# Altium PCB FILTROS.PcbDoc
Units mm, origin at the board's own origin, x right, y up, seen from the top; angles counter-clockwise.
Board outline 40 x 50 mm, 2 copper layers (Top Layer, Bottom Layer); 40 components, 24 nets, 99 pads, 14 vias.
Unrouted connection lines stored in the file: 2.
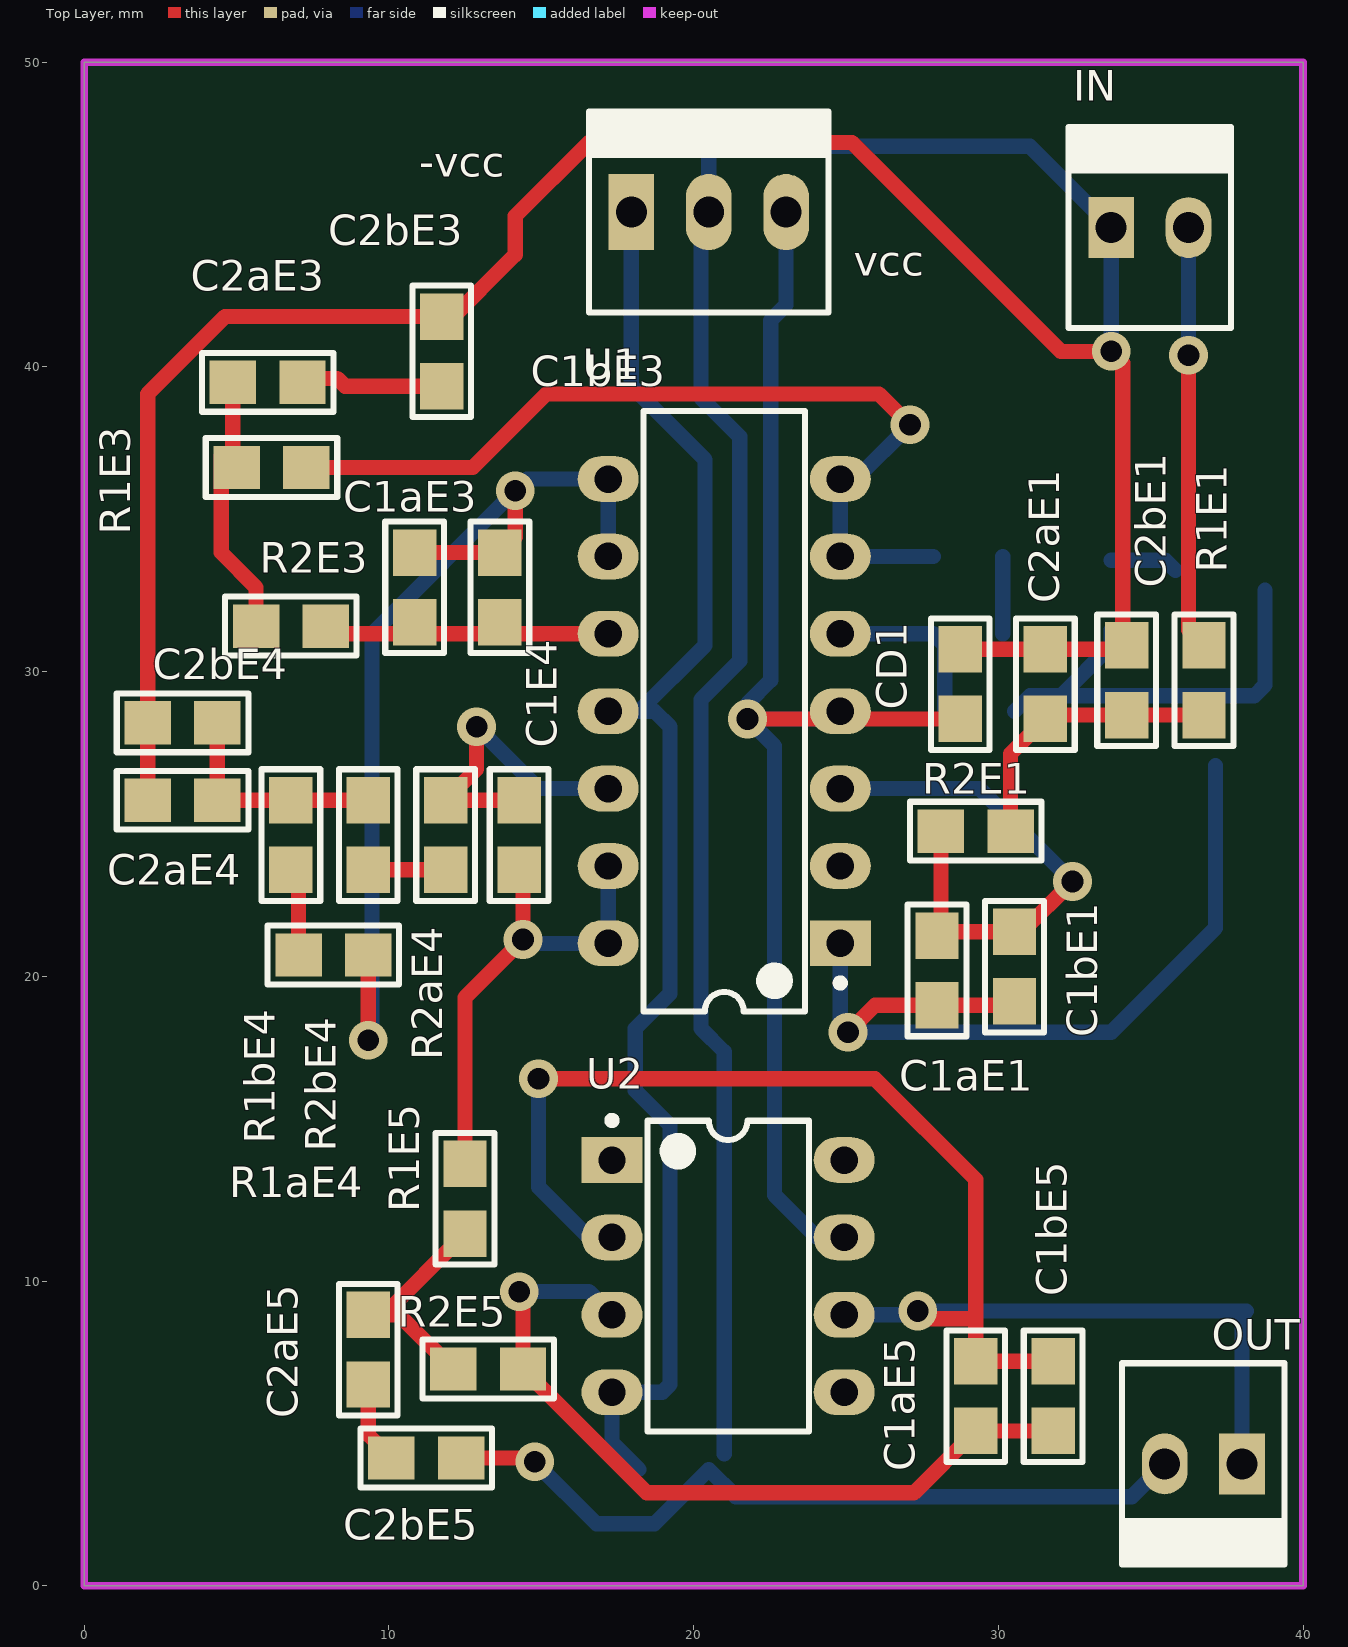
[diagram p0: Top Layer view]
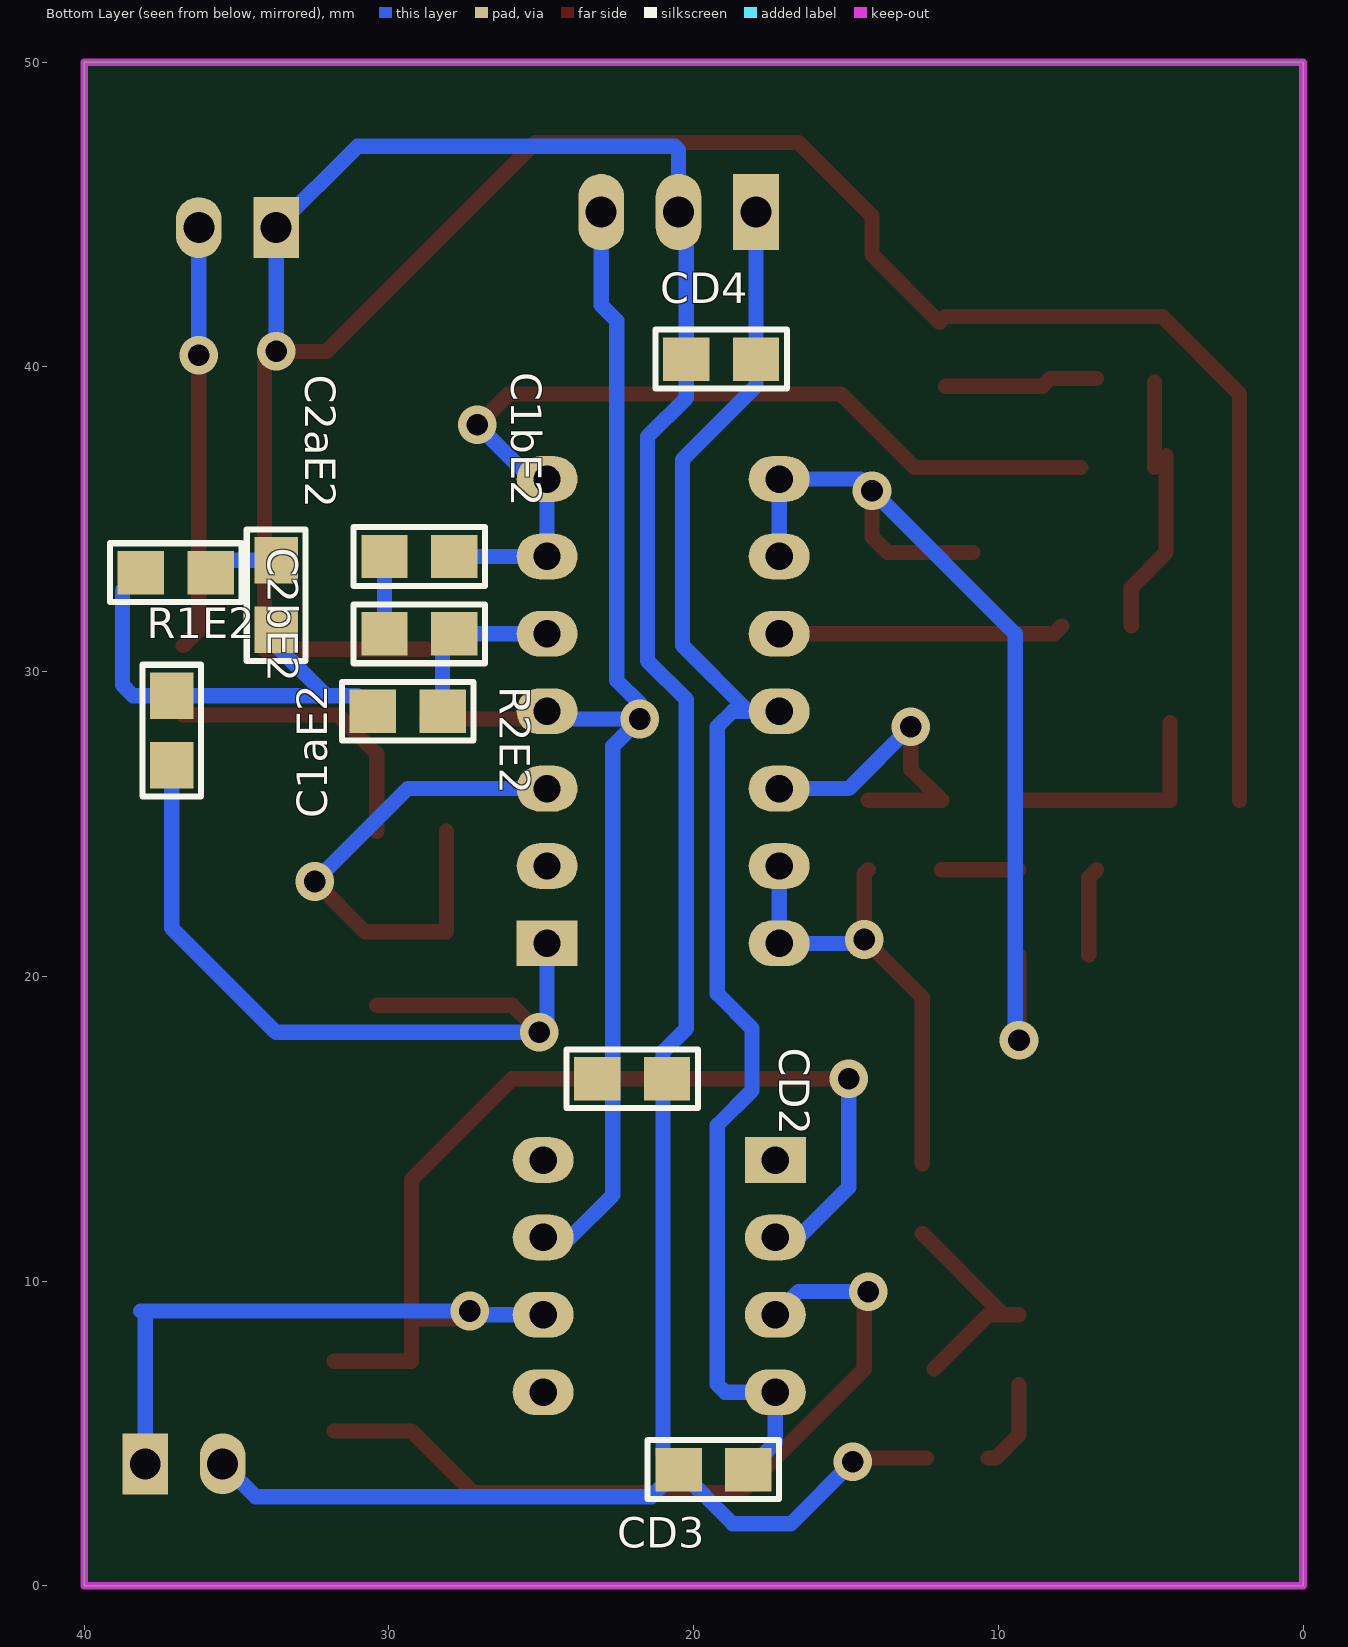
[diagram p1: Bottom Layer view, seen from below]
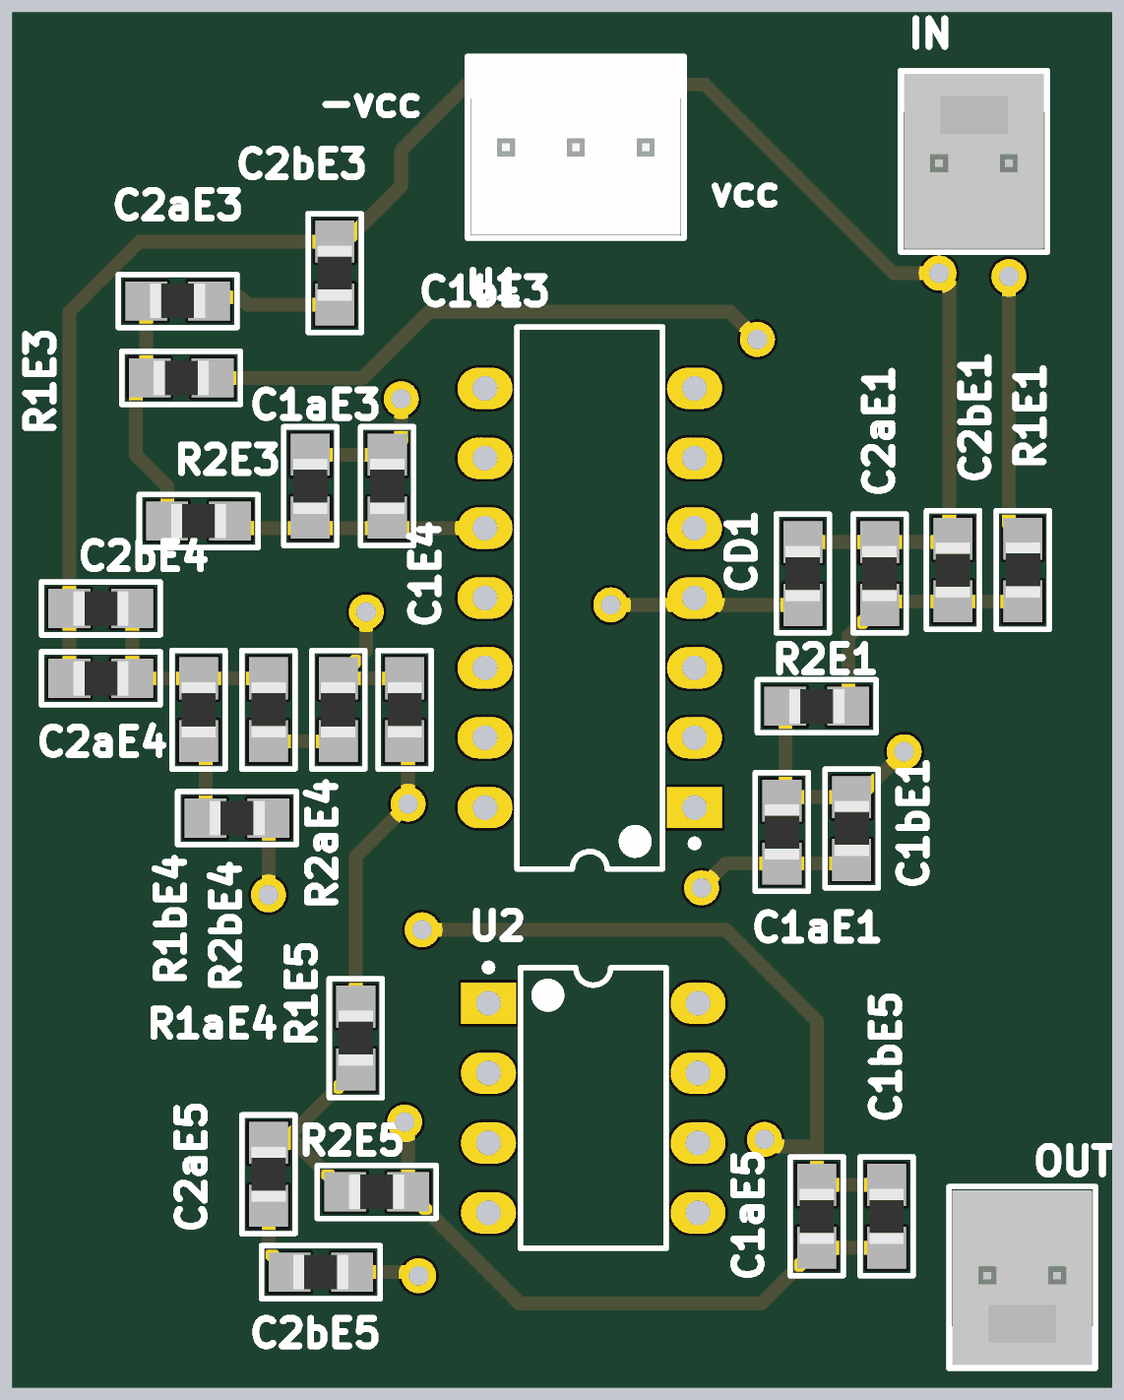
[diagram p2: 3D render of the assembled board from above, using the file's embedded part models]
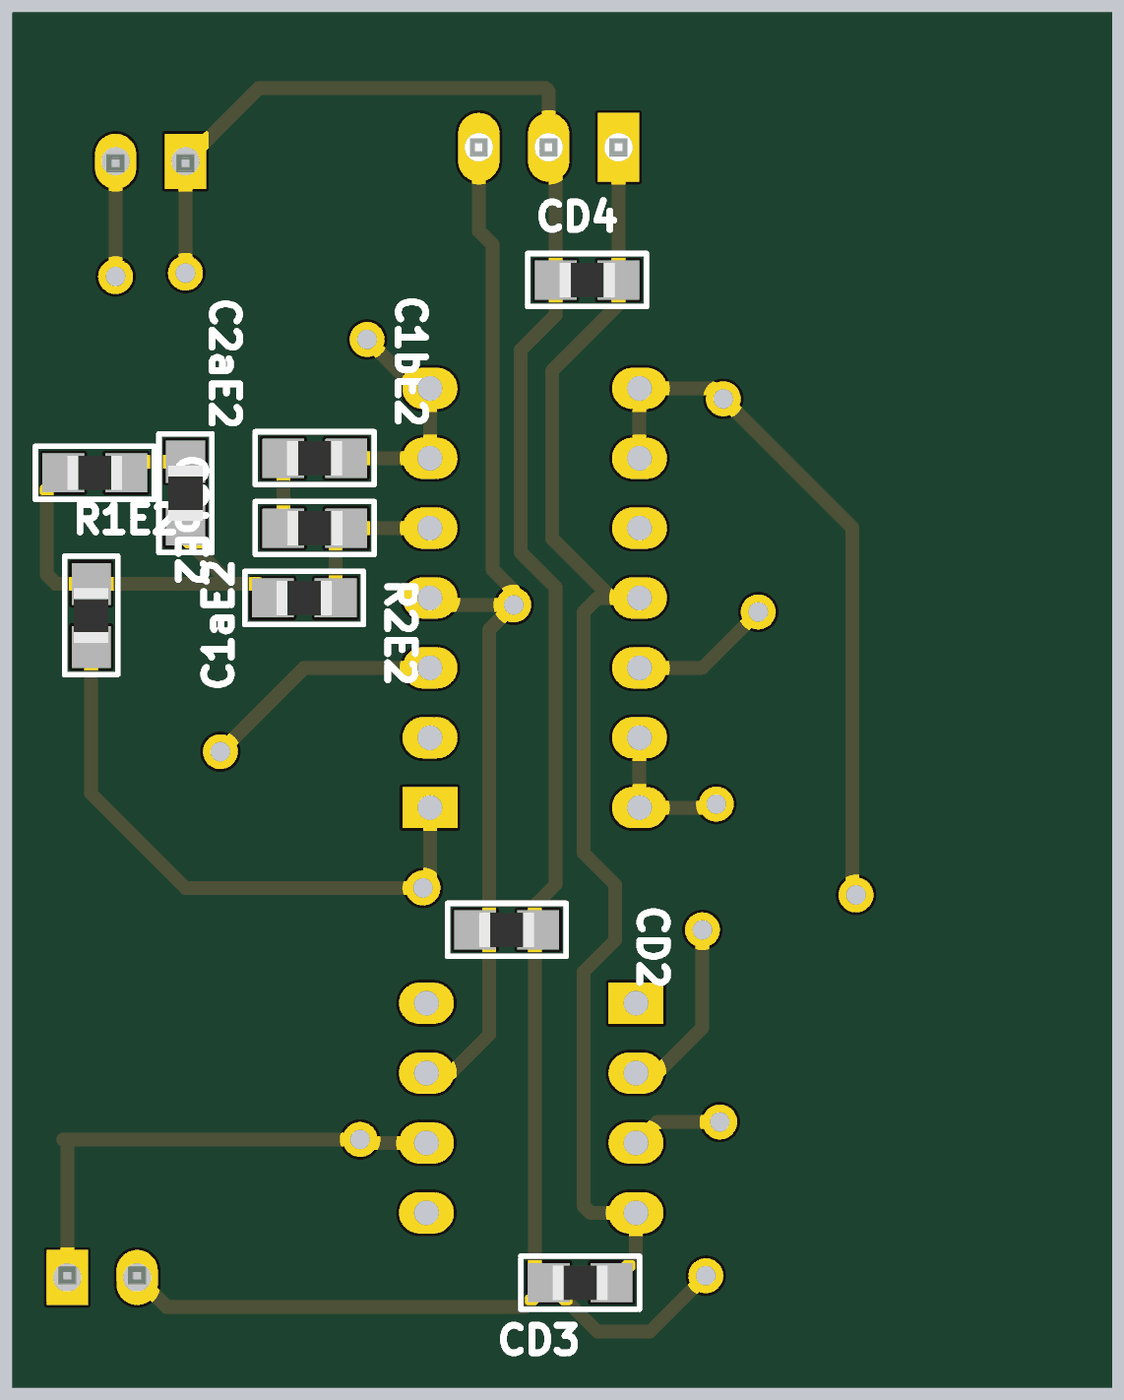
[diagram p3: 3D render of the assembled board from below, using the file's embedded part models]

## Layer stack, top to bottom
Top Solder: solder mask 0.0102, Solder Resist, Dk 3.5
Top Layer: signal copper 0.0356
Dielectric 1: dielectric 0.32, FR-4, Dk 4.8
Bottom Layer: signal copper 0.0356
Bottom Solder: solder mask 0.0102, Solder Resist, Dk 3.5

## Board outline
0,0 40,0 40,50 0,50

## Design rules (kind name [scope] priority, off if disabled: settings)
Clearance [All] p1: gap=0.254
PolygonConnect [All] p1: connectstyle=Relief reliefconductorwidth=0.254 reliefentries=4 polygonreliefangle="90 Angle" airgapwidth=0.254
RoutingVias [All] p1: holewidth=0.711 width=1.27 viastyle="Through Hole" minholewidth=0.711 minwidth=1.27 maxholewidth=0.711 maxwidth=1.27
SolderMaskExpansion [All] p1: expansion=0.102
Width [All] p1: maxlimit=0.5 minlimit=0.5 preferedwidth=0.5
30 further rules are at their usual default settings.

## Components (designator, comment, footprint, x,y, rotation, side; value= is the part's Value field where it differs from the comment)
C1aE1 "CAP" 0805 27.988,20.193 r270 top
C1aE2 "CAP" 0805 29.004,31.242 r0 bottom
C1aE3 "CAP" 0805 10.843,32.766 r90 top
C1aE5 "CAP" 0805 29.258,6.223 r90 top
C1bE1 "CAP" 0805 30.528,20.32 r270 top
C1bE2 "CAP" 0805 29.004,33.782 r180 bottom
C1bE3 "CAP" 0805 13.637,32.766 r90 top
C1bE5 "CAP" 0805 31.798,6.223 r90 top
C1E4 "CAP" 0805 14.272,24.638 r270 top
C2aE1 "CAP" 0805 31.544,29.591 r90 top
C2aE2 "CAP" 0805 33.703,32.512 r90 bottom
C2aE3 "CAP" 0805 6.017,39.497 r0 top
C2aE4 "CAP" 0805 3.223,25.781 r180 top
C2aE5 "CAP" 0805 9.319,7.747 r270 top
C2bE1 "CAP" 0805 34.211,29.718 r90 top
C2bE2 "CAP" 0805 37,33.25 r180 bottom
C2bE3 "CAP" 0805 11.732,40.513 r90 top
C2bE4 "CAP" 0805 3.223,28.321 r180 top
C2bE5 "CAP" 0805 11.224,4.191 r0 top
CD1 "CAP" 0805 28.75,29.591 r90 top
CD2 "CAP" 0805 22.019,16.637 r180 bottom
CD3 "CAP" 0805 19.352,3.81 r0 bottom
CD4 "CAP" 0805 19.098,40.259 r0 bottom
IN "MOLEX2" MOLEX2 33.703,44.577 r0 top
OUT "MOLEX2" MOLEX2 38,4 r180 top
R1aE4 "RES" 0805 8.176,20.701 r180 top
R1bE4 "RES" 0805 6.779,24.638 r90 top
R1E1 "RES" 0805 36.751,29.718 r270 top
R1E2 "RES" 0805 37.132,28.067 r90 bottom
R1E3 "RES" 0805 6.144,36.703 r180 top
R1E5 "RES" 0805 12.494,12.7 r270 top
R2aE4 "RES" 0805 11.859,24.638 r90 top
R2bE4 "RES" 0805 9.319,24.638 r270 top
R2E1 "RES" 0805 29.258,24.765 r180 top
R2E2 "RES" 0805 29.385,28.702 r180 bottom
R2E3 "RES" 0805 6.779,31.496 r0 top
R2E5 "RES" 0805 13.256,7.112 r0 top
U1 "TL084ACNE4" TI-N14 21.003,28.702 r180 top
U2 "TL081ACP" TI-P8 21.13,10.16 r0 top
vcc "MOLEX3" MOLEX3 17.955,45.085 r0 top (schematic designator ALIMENTACION)

## Footprints (in the part's own frame and the unit in brackets; to place one, negate y for a bottom-side part, rotate by r counter-clockwise, add the part's x,y. Pads: shape width x height; smd on the part's side, far side on the other; paste and mask are expansions set on the pad)
0805 [mil] "Pasivo 0805"
  rect 60x56 smd: 1(-45,0) 2(45,0)
  silkscreen extent -85,-38 85,38, body extent -40,-25 39,25, height 15
MOLEX2 [mm]
  rect 1.5x2 hole 1.016: 1(0,0)
  oval 1.5x2 hole 1.016: 2(2.54,0)
  silkscreen extent -1.4,-3.3 3.94,3.3, body extent -1.27,-3.17 3.81,3.17, height 10.74
MOLEX3 [mm]
  rect 1.5x2.5 hole 1.016: 1(0,0)
  oval 1.5x2.5 hole 1.016: 2(2.54,0) 3(5.08,0)
  silkscreen extent -1.4,-3.3 6.48,3.3, body extent -1.27,-3.17 6.35,3.17, height 10.74
TI-N14 [mm] "DIP, 14-Leads, Body 19.305x6.35 mm, Pitch 2.54 mm"
  rect 2x1.5 hole 0.9: 1(-3.81,7.62)
  oval 2x1.5 hole 0.9: 2(-3.81,5.08) 3(-3.81,2.54) 4(-3.81,0) 5(-3.81,-2.54) 6(-3.81,-5.08) 7(-3.81,-7.62) 8(3.81,-7.62) 9(3.81,-5.08) 10(3.81,-2.54) 11(3.81,0) 12(3.81,2.54) 13(3.81,5.08) 14(3.81,7.62)
  silkscreen extent -3.94,-9.85 2.65,9.85, body extent -3.3,-9.85 3.3,9.85, height 5.08
TI-P8 [mm] "DIP, 8-Leads, Body 9.59x6.35mm, Pitch 2.54mm"
  rect 2x1.5 hole 0.9: 1(-3.81,3.81)
  oval 2x1.5 hole 0.9: 2(-3.81,1.27) 3(-3.81,-1.27) 4(-3.81,-3.81) 5(3.81,-3.81) 6(3.81,-1.27) 7(3.81,1.27) 8(3.81,3.81)
  silkscreen extent -3.93,-5.1 2.65,5.23, body extent -3.95,-5.07 3.95,5.07, height 5.08

## Part data
U1: "JFET-Input Operational Amplifier, 7 to 36 V, 0 to 70 degC, 14-pin DIP (N14), Pb-Free (RoHS)"
U2: "JFET-Input Operational Amplifier, 7 to 36 V, 0 to 70 degC, 8-pin DIP (P8), Pb-Free (RoHS)"

## Via types
v1: diameter 1.27, hole 0.711, Top Layer to Bottom Layer, 14 vias

## Nets (pads, with @x,y where several pads share a name; then routed paths per layer and width w, separated by ;. In a path a pad name is that pad's centre, name@x,y a point inside that pad or via, vN(x,y) a via of type N, cw(c..) or ccw(c..) an arc to the next point about the centre after c; other vN are vias at no path point)
-VCC: CD3.1 CD4.1 U1.11 U2.4 vcc.1 | length 48
  Bottom Layer w0.5: U1.11 18.209,28.702 ; vcc.1 17.955,39.37 20.368,36.957 20.368,30.861 18.209,28.702 ; CD3.1 17.32,4.699 U2.4 18.971,6.35 19.225,6.604 19.225,15.113 18.082,16.256 18.082,18.288 19.225,19.431 19.225,28.194 18.717,28.702 18.209,28.702
GND: C2aE1.2 C2aE2.2 C2aE4.2 C2bE1.2 C2bE2.2 C2bE3.2 C2bE4.2 C2bE5.2 CD1.2 CD2.2 CD3.2 CD4.2 IN.1 OUT.2 vcc.2 | length 157.6
  Top Layer w0.5: C2aE4.2 C2bE4.2 2.08,39.116 4.62,41.656 C2bE3.2 ; C2bE3.2@11.923,41.466 14.145,43.688 14.145,44.958 16.558,47.371 25.194,47.371 32.052,40.513 v1(33.703,40.513) 34.084,40.132 34.084,30.734 C2aE1.2 CD1.2 ; C2bE5.2 14.653,4.191 v1(14.78,4.064)
  Bottom Layer w0.5: v1(14.78,4.064) 16.812,2.032 18.717,2.032 CD3.2 21.384,2.921 34.381,2.921 OUT.2 ; CD3.2@21.003,4.318 21.003,17.526 20.241,18.288 20.241,29.083 21.511,30.353 21.511,37.719 20.241,38.989 CD4.2 20.241,44.831 vcc.2 20.495,47.117 20.622,47.244 31.036,47.244 IN.1 v1(33.703,40.513) ; C2aE2.2 35.481,33.655 C2bE2.2@35.818,33.318
NetC1aE1_1: C1aE1.1 C1bE1.1 R2E1.2 U1.3 | length 17
  Top Layer w0.5: R2E1.2 28.115,21.463 C1bE1.1 30.782,21.463 v1(32.433,23.114)
  Bottom Layer w0.5: U1.3 29.385,26.162 v1@32.306,23.241
NetC1aE1_2: C1aE1.2 C1bE1.2 R1E2.1 U1.1 U1.2 | length 27.5
  Top Layer w0.5: v1(25.067,18.161) 25.956,19.05 C1aE1.2 C1bE1.2@30.401,19.05
  Bottom Layer w0.5: U1.1 24.813,18.415 v1(25.067,18.161) 33.703,18.161 37.132,21.59 R1E2.1
NetC1aE2_1: C1aE2.1 R2E2.2 U1.5 | length 5.7
  Bottom Layer w0.5: U1.5 C1aE2.1 28.242,30.861 R2E2.2
NetC1aE2_2: C1aE2.2 C1bE2.1 | length 2.5
  Bottom Layer w0.5: C1aE2.2 C1bE2.1
NetC1aE3_1: C1aE3.1 C1bE3.1 R2E3.2 U1.10 | length 9.4
  Top Layer w0.5: R2E3.2 8.176,31.242 U1.10
NetC1aE3_2: C1aE3.2 C1bE3.2 R1aE4.1 U1.8 U1.9 | length 33.6
  Top Layer w0.5: v1(9.319,17.907) R1aE4.1 ; C1aE3.2 C1bE3.2 14.145,34.417 v1(14.145,35.941)
  Bottom Layer w0.5: v1(9.319,17.907) 9.446,18.034 9.446,31.242 v1(14.145,35.941) 14.526,36.322 U1.8 U1.9
NetC1aE5_1: C1aE5.1 C1bE5.1 R2E5.2 U2.3 | length 25.9
  Top Layer w0.5: v1(14.272,9.652) 14.399,9.525 R2E5.2 18.463,3.048 27.226,3.048 C1aE5.1 C1bE5.1
  Bottom Layer w0.5: v1(14.272,9.652) 16.558,9.652 U2.3
NetC1aE5_2: C1aE5.2 C1bE5.2 OUT.1 U2.2 U2.6 | length 50.5
  Top Layer w0.5: v1(14.907,16.637) 25.956,16.637 29.258,13.335 29.258,8.763 ; v1(27.353,9.017) 27.607,8.763 29.258,8.763 ; C1bE5.2 C1aE5.2 29.258,8.763
  Bottom Layer w0.5: v1(14.907,16.637) 14.907,13.081 16.558,11.43 U2.2 ; U2.6 27.226,8.89 v1(27.353,9.017) 38.148,9.017 38,8.869 OUT.1@38,4.699
NetC1bE2_2: C1bE2.2 R1E3.1 U1.6 U1.7 | length 29.8
  Top Layer w0.5: R1E3.1 12.748,36.703 15.161,39.116 26.083,39.116 v1(27.099,38.1)
  Bottom Layer w0.5: v1(27.099,38.1) 25.321,36.322 U1.7 U1.6 C1bE2.2
NetC1E4_1: C1E4.1 R2aE4.2 U1.12 | length 10.4
  Top Layer w0.5: v1(12.875,28.194) 12.875,26.797 R2aE4.2 C1E4.1
  Bottom Layer w0.5: v1(12.875,28.194) 14.907,26.162 U1.12
NetC1E4_2: C1E4.2 R1E5.1 U1.13 U1.14 | length 15.9
  Top Layer w0.5: R1E5.1 12.494,19.304 v1(14.399,21.209) 14.399,23.368 C1E4.2
  Bottom Layer w0.5: v1(14.399,21.209) 14.526,21.082 U1.14 U1.13
NetC2aE1_1: C2aE1.1 C2bE1.1 R1E1.2 R2E1.1 | length 9.4
  Top Layer w0.5: R2E1.1 30.401,27.305 C2aE1.1 31.671,28.575 C2bE1.1 R1E1.2
NetC2aE2_1: C2aE2.1 C2bE2.1 R1E2.2 R2E2.1 | length 14.5
  Bottom Layer w0.5: R2E2.1 31.036,29.21 32.052,29.21 ; C2aE2.1 33.703,30.861 32.052,29.21 ; C2bE2.1@38.75,32.672 38.75,29.558 38.402,29.21 R1E2.2 32.052,29.21
NetC2aE3_1: C2aE3.1 R1E3.2 R2E3.1 | length 9.4
  Top Layer w0.5: C2aE3.1 4.874,36.703 4.493,37.084 4.493,33.909 5.636,32.766 R2E3.1
NetC2aE3_2: C2aE3.2 C2bE3.1 | length 5.1
  Top Layer w0.5: C2aE3.2@6.779,39.624 8.303,39.624 8.557,39.37 C2bE3.1
NetC2aE4_1: C2aE4.1 C2bE4.1 R1bE4.2 R2bE4.1 | length 7.5
  Top Layer w0.5: C2bE4.1 C2aE4.1 R1bE4.2 R2bE4.1
NetC2aE5_1: C2aE5.1 R1E5.2 R2E5.1 | length 7.3
  Top Layer w0.5: C2aE5.1 C2aE5.1@9.827,8.89 ; R2E5.1 10.335,8.89 C2aE5.1@9.827,8.89 ; R1E5.2 C2aE5.1@9.827,8.89
NetC2aE5_2: C2aE5.2 C2bE5.1 | length 3
  Top Layer w0.5: C2aE5.2 9.319,4.953 C2bE5.1 C2bE5.1@10.335,4.191
NetIN_2: IN.2 R1E1.1 | length 13.9
  Top Layer w0.5: v1(36.243,40.386) 36.243,31.369 R1E1.1
  Bottom Layer w0.5: v1(36.243,40.386) IN.2
NetR1aE4_2: R1aE4.2 R1bE4.1 | length 2.9
  Top Layer w0.5: R1bE4.1 7.033,23.241 R1aE4.2
NetR2aE4_1: R2aE4.1 R2bE4.2 | length 2.5
  Top Layer w0.5: R2bE4.2 R2aE4.1
VCC: CD1.1 CD2.1 U1.4 U2.7 vcc.3 | length 46.2
  Top Layer w0.5: v1(21.765,28.448) CD1.1
  Bottom Layer w0.5: vcc.3 23.035,42.037 22.527,41.529 22.527,29.718 21.765,28.956 v1(21.765,28.448) ; U1.4 24.559,28.448 v1(21.765,28.448) ; U2.7 24.051,11.43 22.654,12.827 22.654,27.559 v1(21.765,28.448)
pads on no net: U2.1 U2.5 U2.8
copper on no net: | length 24.4
  Top Layer w0.5: -63.833,2459.584 -66.5,2462.251 -62.563,2462.251 -62.69,2462.251 -61.039,2462.251 -60.658,2462.251 -58.982,2462.251 -56.467,2459.736 ; -2.365,2455.647 4.239,2462.251

## Keep-outs
Keep-Out Layer:
  the board outline again, w0.254

## Silkscreen, mask and mechanical layers (free items; w line width, h text height)
Top Overlay:
  text "-vcc" at 11,46.25 h1